# Altium PCB Power_board_2024-08-19.pcbdoc
Units mil, origin at the board's own origin, x right, y up, seen from the top; angles counter-clockwise.
Board outline 1647.8 x 1638.86 mil, 2 copper layers (Top Layer, Bottom Layer); 12 components, 6 nets, 29 pads, 2 vias.
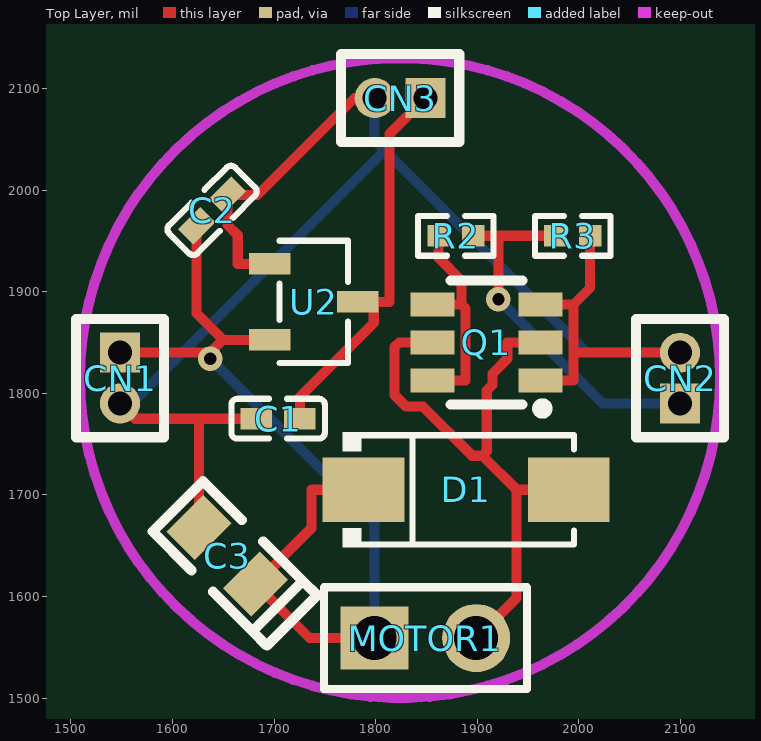
[diagram p0: Top Layer view]
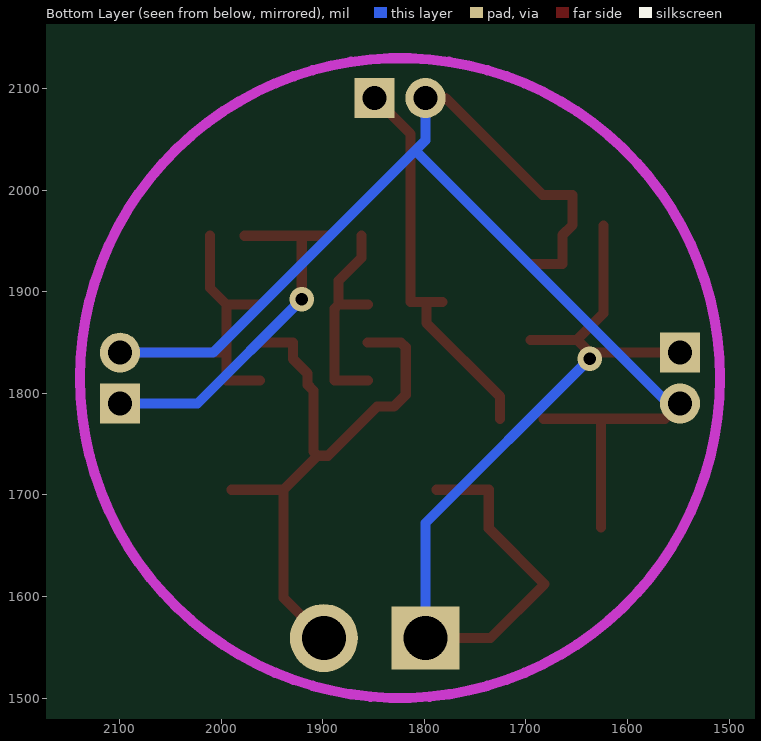
[diagram p1: Bottom Layer view, seen from below]

## Layer stack, top to bottom
Top Layer: signal copper (thickness not stored)
Dielectric: dielectric 12.6, FR-4, Dk 4.8
Bottom Layer: signal copper (thickness not stored)

## Board outline
2647.8,1000 1000,1000 1000,2638.86 2647.8,2638.86

## Components (designator, comment, footprint, x,y, rotation, side; value= is the part's Value field where it differs from the comment)
C1 "10uF" C0402 1703.9,1774.96 r0 top
C2 "10uF" C0402 1638.9,1979.96 r225 top
C3 "10uF/6.3V" CASE-R_2012 1653.9,1639.96 r315 top
CN1 "KH-1.27FH-1X2P-H4.3" HDR-TH_2P-P1.27-V-F 1548.31,1814.96 r270 top
CN2 "KH-1.27FH-1X2P-H4.3" HDR-TH_2P-P1.27-V-F 2099.49,1814.96 r90 top
CN3 "KH-1.27FH-1X2P-H4.3" HDR-TH_2P-P1.27-V-F 1823.9,2090.55 r180 top
D1 "SS14" SMA_L4.4-W2.8-LS5.4-RD 1888.9,1704.96 r0 top
MOTOR1 "HDR-M-2.54_1x2" HDR-M-2.54_1X2 1848.9,1559.06 r0 top
Q1 "FS8205A_C2830320" SOT-23-6_L2.9-W1.6-P0.95-LS2.8-BR 1908.9,1849.96 r0 top
R2 "470" R0402 1878.9,1954.96 r180 top
R3 "10k" R0402 1993.9,1954.96 r180 top
U2 "ME6210A33M3G" SOT-23-3_L3.0-W1.7-P0.95-LS2.9-BR 1738.9,1889.96 r180 top

## Footprints (in the part's own frame and the unit in brackets; to place one, negate y for a bottom-side part, rotate by r counter-clockwise, add the part's x,y. Pads: shape width x height; smd on the part's side, far side on the other; paste and mask are expansions set on the pad)
C0402 [mm]
  rect 0.79x0.54 smd: 1(-0.545,0) 2(0.545,0)
  silkscreen extent -1.17,-0.5 1.17,0.5
CASE-R_2012 [mm]
  rect 1x1.3 smd: 1(1,0) 2(-1,0)
  silkscreen extent -1.75,-0.89 2.29,0.89
HDR-M-2.54_1X2 [mm]
  rect 1.7x1.575 hole 1.1: 1(-1.27,0)
  round 1.7 hole 1.1: 2(1.27,0)
  silkscreen extent -2.54,-1.27 2.54,1.27
HDR-TH_2P-P1.27-V-F [mm]
  rect 1x1 hole 0.6: 1(-0.635,0)
  round 1 hole 0.6: 2(0.635,0)
  silkscreen extent -1.48,-1.1 1.48,1.1
R0402 [mm]
  rect 0.566x0.54 smd: 1(-0.433,0) 2(0.433,0)
  silkscreen extent -0.94,-0.5 0.94,0.5
SMA_L4.4-W2.8-LS5.4-RD [mm]
  rect 2.046x1.62 smd: 1(-2.566,0) 2(2.565,0)
  silkscreen extent -3.08,-1.44 2.7,1.44
SOT-23-3_L3.0-W1.7-P0.95-LS2.9-BR [mm]
  rect 1.037x0.532 smd: 1(1.101,-0.95) 2(1.101,0.95) 3(-1.101,0)
  silkscreen extent -0.86,-1.53 0.86,1.53
SOT-23-6_L2.9-W1.6-P0.95-LS2.8-BR [mm]
  rect 1.1x0.6 smd: 1(1.35,-0.95) 2(1.35,0) 3(1.35,0.95) 4(-1.35,0.95) 5(-1.35,0) 6(-1.35,-0.95)
  silkscreen extent -0.9,-1.78 1.52,1.55

## Via types
v1: diameter 24.02, hole 12.01, Top Layer to Bottom Layer, tented both sides, 2 vias

## Nets (pads, with @x,y where several pads share a name; then routed paths per layer and width w, separated by ;. In a path a pad name is that pad's centre, name@x,y a point inside that pad or via, vN(x,y) a via of type N, cw(c..) or ccw(c..) an arc to the next point about the centre after c; other vN are vias at no path point)
3V3: C2.2 C3.1 CN1.1 D1.1 MOTOR1.1 U2.2 | length 929.4
  Top Layer w10: CN1.1 1578.99,1839.96 v1@1637.08,1839.96 ; C2.2 1623.73,1878.51 1649.68,1852.56 ; v1(1637.08,1834.04) v1@1637.08,1839.96 ; U2.2 1649.68,1852.56 ; D1.1 1736.62,1704.96 1736.62,1667 C3.1 1734.81,1559.05 MOTOR1.1 ; v1@1637.08,1839.96 1649.68,1852.56
  Bottom Layer w10: v1(1637.08,1834.04) 1798.9,1672.22 MOTOR1.1
GND: C1.1 C2.1 C3.2 CN1.2 CN2.2 CN3.2 Q1.1 Q1.3 R3.1 U2.1 | length 1646.9
  Top Layer w10: CN1.2 1563.31,1774.96 1626.06,1774.96 ; C3.2 1626.06,1774.96 ; C1.1 1626.06,1774.96 ; U2.1 1664.13,1927.36 1664.13,1955.57 1654.07,1965.63 C2.1 1683.58,1995.13 1779,2090.55 CN3.2 ; Q1.1@1962.05,1812.56 1994.7,1812.56 1994.77,1812.63 1994.77,1839.96 ; Q1.3@1962.05,1887.36 1994.7,1887.36 ; R3.1 2010.94,1933.34 2010.94,1903.6 1994.7,1887.36 ; CN2.2 1994.77,1839.96 ; 1994.7,1887.36 1994.77,1887.29 1994.77,1839.96
  Bottom Layer w10: CN1.2 1559.99,1789.96 1808.96,2038.93 ; CN3.2 1798.9,2048.99 1808.96,2038.93 ; CN2.2 2007.93,1839.96 1808.96,2038.93
PWM1: CN2.1 R2.1 R3.2 | length 364.6
  Top Layer w10: R2.1 1920.68,1954.96 ; v1(1920.68,1892.58) 1920.68,1954.96 ; R3.2 1920.68,1954.96
  Bottom Layer w10: v1(1920.68,1892.58) 2023.3,1789.96 CN2.1
Q1_2: D1.2 MOTOR1.2 Q1.2 Q1.5 | length 613
  Top Layer w10: Q1.5 1823.11,1849.96 1818.35,1845.2 1818.35,1798.4 1829.93,1786.82 1846.52,1786.82 1894.85,1738.49 1905.09,1738.49 ; MOTOR1.2 1938.63,1598.78 1938.63,1704.96 ; Q1.2@1962.05,1849.96 1929.41,1849.96 1929.41,1833.87 1914.87,1819.33 1914.87,1808.42 1909.22,1802.77 1909.22,1742.62 1905.1,1738.5 ; D1.2 1938.63,1704.96 ; 1905.1,1738.5 1938.63,1704.96
Q1_4: Q1.4 Q1.6 R2.2 | length 214.8
  Top Layer w10: Q1.6 1888.39,1812.56 1888.46,1812.63 1888.46,1883.32 1884.42,1887.36 ; Q1.4 1884.42,1887.36 ; R2.2 1861.86,1933.34 1884.42,1910.78 1884.42,1887.36
VBAT: C1.2 CN3.1 U2.3 | length 391.7
  Top Layer w10: C1.2 1725.36,1796.58 1797.97,1869.19 U2.3@1797.97,1889.96 ; U2.3 U2.3@1797.97,1889.96 ; CN3.1 1813.67,2055.32 1813.67,1889.96 U2.3@1797.97,1889.96

## Keep-outs
Keep-Out Layer:
  circle w10: c1823.9,1814.96 r314.96